# Altium PCB PCB_VS1005BOB-Pico-LCD_2024-06-08.pcbdoc
Units mil, origin at the board's own origin, x right, y up, seen from the top; angles counter-clockwise.
Board outline 9794.76 x 7584.54 mil, 2 copper layers (Top Layer, Bottom Layer); 49 components, 160 nets, 726 pads, 78 vias.
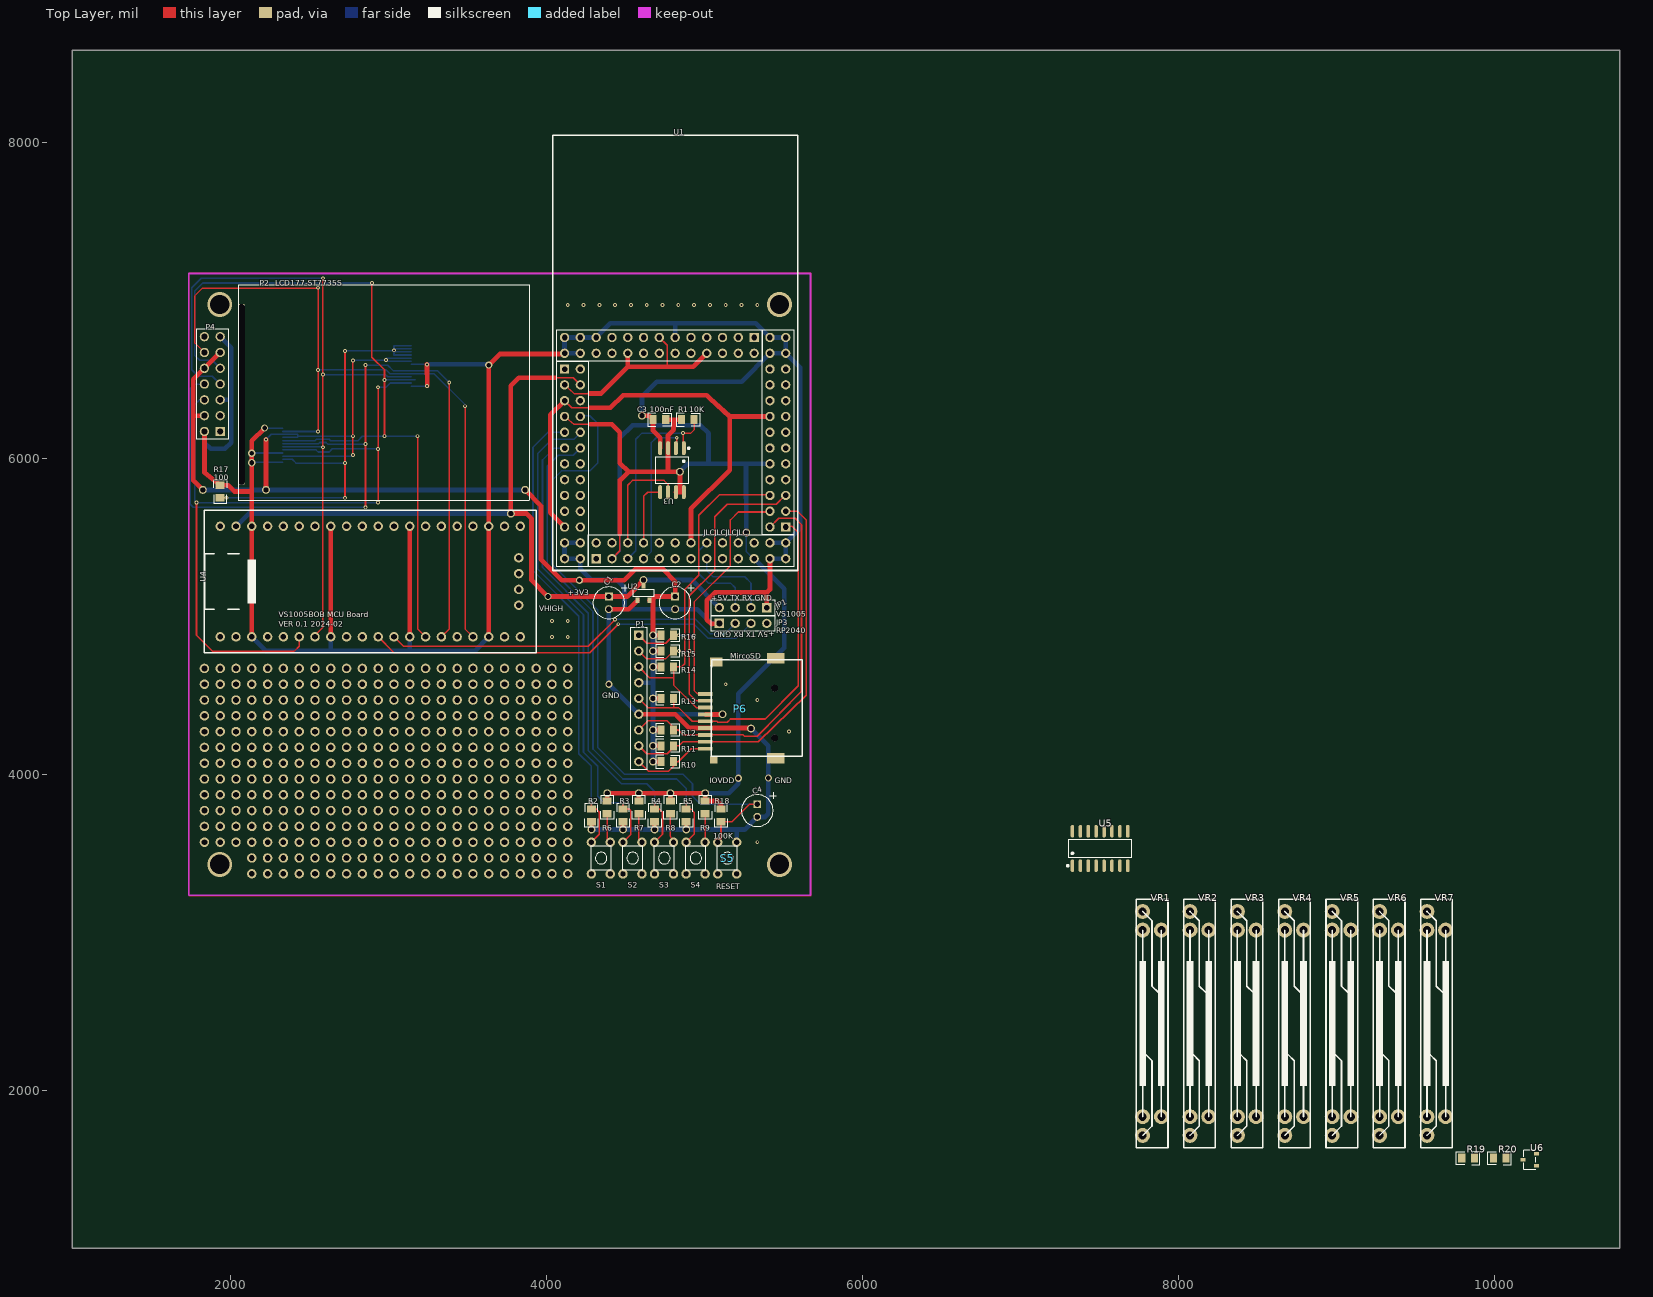
[diagram p0: Top Layer view]
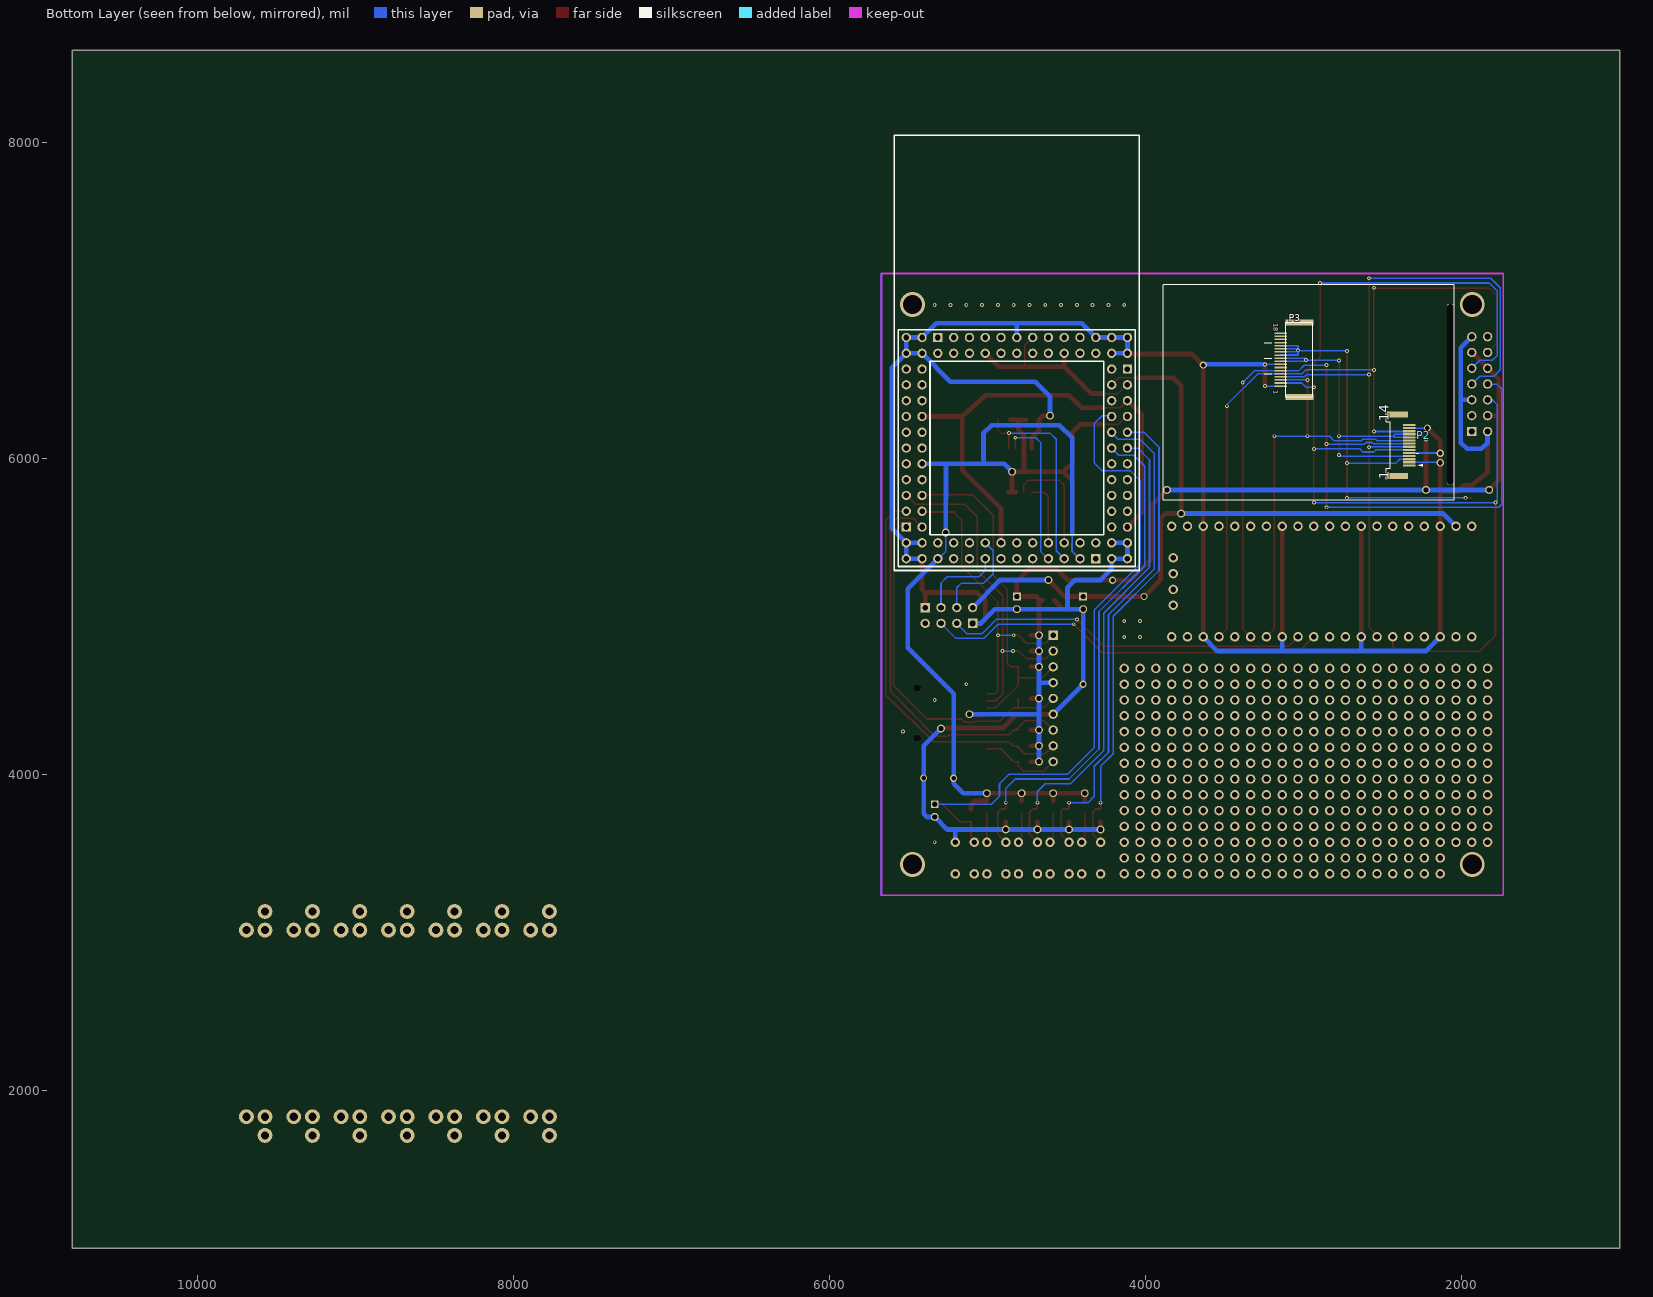
[diagram p1: Bottom Layer view, seen from below]

## Layer stack, top to bottom
Top Layer: signal copper (thickness not stored)
Dielectric: dielectric 12.6, FR-4, Dk 4.8
Bottom Layer: signal copper (thickness not stored)

## Board outline
10794.76,1000 1000,1000 1000,8584.54 10794.76,8584.54

## Components (designator, comment, footprint, x,y, rotation, side; value= is the part's Value field where it differs from the comment)
C1 "10uF" CAP-DIP 4395.86,5087.04 r270 top
C2 "10uF" CAP-DIP 4815.86,5087.04 r270 top
C3 "100nF" CAP-0805 4715.86,6247.04 r180 top
C4 "1uF" CAP-DIP 5335.86,3772.04 r270 top
JP1 "UART_VS10XX" HDR1X4#1 5395.86,5057.04 r180 top
JP3 "UART_PICO" HDR1X4#2 5095.86,4957.04 r0 top
P1 "Header 9" HDR1X9 4585.86,4882.04 r270 top
P2 "LCD177-ST7735S" LCD177-ST7735S 2435.86,6722.04 r270 top
P3 "LCD28-ST7789-HDR2X7" FPC18 3185.86,6372.04 r0 bottom
P4 "Header 7X2" HDR2X7 1935.86,6172.04 r90 top
P6 "MircoSD" MICROSD 5445.86,4232.04 r0 top
R1 "10K" RES-0805 4895.86,6247.04 r180 top
R2 "10K" RES-0805 4285.86,3742.04 r90 top
R3 "10K" RES-0805 4485.86,3742.04 r90 top
R4 "10K" RES-0805 4685.86,3742.04 r90 top
R5 "10K" RES-0805 4885.86,3742.04 r90 top
R6 "10K" RES-0805 4385.86,3792.04 r90 top
R7 "10K" RES-0805 4585.86,3792.04 r90 top
R8 "10K" RES-0805 4785.86,3792.04 r90 top
R9 "10K" RES-0805 5005.86,3792.04 r90 top
R10 "10K" RES-0805 4765.86,4082.04 r180 top
R11 "10K" RES-0805 4765.86,4182.04 r180 top
R12 "10K" RES-0805 4765.86,4282.04 r180 top
R13 "10K" RES-0805 4765.86,4482.04 r180 top
R14 "10K" RES-0805 4765.86,4682.04 r180 top
R15 "10K" RES-0805 4765.86,4782.04 r180 top
R16 "10K" RES-0805 4765.86,4882.04 r180 top
R17 "100" RES-0805 1935.86,5792.04 r270 top
R18 "100K" RES-0805 5105.86,3742.04 r90 top
R19 "10K" RES-0805 9835.86,1572.04 r0 top
R20 "10K" RES-0805 10035.86,1572.04 r0 top
S1 "UP" SW-4.5 4405.86,3572.04 r180 top
S2 "DOWN" SW-4.5 4605.86,3572.04 r180 top
S3 "D2" SW-4.5 4805.86,3572.04 r180 top
S4 "D3" SW-4.5 5005.86,3572.04 r180 top
S5 "RESET" SW-4.5 5205.86,3572.04 r180 top
U1 "VS1005BOB" VS1005BOB 4815.86,6067.04 r0 top
U2 "VOX6206" VOX6206 4615.86,5182.04 r0 top
U3 "GD25Q16CSIG" SOIC-8_L5.3-W5.3-P1.27-LS8.0-BL 4795.86,5927.04 r180 top
U4 "YD_RP2040" YD-RP2040 3435.86,5222.04 r90 top
U5 "74HC4051" SOP-16_L9.9-W3.9-P1.27-LS6.0-BL 7505.86,3532.04 r0 top
U6 "SI2302 A2" SOT-23-3_L2.9-W1.8-P1.90-LS2.4-BR 10225.86,1562.04 r0 top
VR1 "SVR-40" SVR-40MM-6P 7735.86,3212.04 r0 top
VR2 "SVR-40" SVR-40MM-6P 8035.86,3212.04 r0 top
VR3 "SVR-40" SVR-40MM-6P 8335.86,3212.04 r0 top
VR4 "SVR-40" SVR-40MM-6P 8635.86,3212.04 r0 top
VR5 "SVR-40" SVR-40MM-6P 8935.86,3212.04 r0 top
VR6 "SVR-40" SVR-40MM-6P 9235.86,3212.04 r0 top
VR7 "SVR-40" SVR-40MM-6P 9535.86,3212.04 r0 top

## Footprints (in the part's own frame and the unit in brackets; to place one, negate y for a bottom-side part, rotate by r counter-clockwise, add the part's x,y. Pads: shape width x height; smd on the part's side, far side on the other; paste and mask are expansions set on the pad)
CAP-0805 [mm]
  rect 1.16x1.45 smd paste+0 mask+0.102: 1(-1.016,0) 2(1.016,0)
  silkscreen extent -1.9,-1.03 1.87,1.04
CAP-DIP [mil]
  rect 50x50 hole 30 slot 30.2 at 0 deg paste+0 mask+2: 1(-40,0)
  round 50 hole 30 slot 30.2 at 0 deg paste+0 mask+2: 2(40,0)
  silkscreen extent -115,-100 100,120
FPC18 [mm]
  rect 4.5x1.016 smd paste+0 mask+0.051: 0(-4.064,-12.446) 0(-4.064,-0.459)
  rect 2x0.25 smd paste+0 mask+0.051: 1(-1.004,-2.209) 2(-1.004,-2.709) 3(-1.004,-3.209) 4(-1.004,-3.709) 5(-1.004,-4.209) 6(-1.004,-4.709) 7(-1.004,-5.209) 8(-1.004,-5.709) 9(-1.004,-6.209) 10(-1.004,-6.709) 11(-1.004,-7.209) 12(-1.004,-7.709) 13(-1.004,-8.209) 14(-1.004,-8.709) 15(-1.004,-9.217) 16(-1.004,-9.725) 17(-1.004,-10.233) 18(-1.004,-10.741)
  silkscreen extent -6.07,-12.45 1.65,-0.46
HDR1X4#1 [mm]
  rect 1.5x1.5 hole 0.9 paste+0 mask+0.051: 1(0,0)
  round 1.5 hole 0.9 paste+0 mask+0.051: 2(2.54,0) 3(5.08,0) 4(7.62,0)
  silkscreen extent -1.27,-1.27 8.89,1.27
HDR1X4#2 [mm]
  rect 1.5x1.5 hole 0.9 slot 0.905 at 0 deg paste+0 mask+0.051: 1(0,0)
  round 1.5 hole 0.9 paste+0 mask+0.051: 2(2.54,0) 3(5.08,0) 4(7.62,0)
  silkscreen extent -1.27,-1.27 8.89,1.27
HDR1X9 [mm]
  rect 1.5x1.5 hole 0.9 paste+0 mask+0.051: 1(0,0)
  round 1.5 hole 0.9 paste+0 mask+0.051: 2(2.54,0) 3(5.08,0) 4(7.62,0) 5(10.16,0) 6(12.7,0) 7(15.24,0) 8(17.78,0) 9(20.32,0)
  silkscreen extent -1.27,-1.27 21.59,1.27
HDR2X7 [mm]
  rect 1.5x1.5 hole 0.9 slot 0.905 at 0 deg paste+0 mask+0.051: 1(0,0)
  round 1.5 hole 0.9 slot 0.905 at 0 deg paste+0 mask+0.051: 2(0,2.54) 3(2.54,0) 4(2.54,2.54) 5(5.08,0) 6(5.08,2.54) 7(7.62,0) 8(7.62,2.54) 9(10.16,0) 10(10.16,2.54) 11(12.7,0) 12(12.7,2.54) 13(15.24,0) 14(15.24,2.54)
  silkscreen extent -1.27,-1.27 16.51,3.81
LCD177-ST7735S [mm]
  rect 0.35x2 smd far side paste+0 mask+0.051: 1(19.431,-2.67) 2(18.931,-2.67) 3(18.431,-2.67) 4(17.931,-2.67) 5(17.431,-2.67) 6(16.931,-2.67) 7(16.431,-2.67) 8(15.931,-2.67) 9(15.431,-2.67) 10(14.931,-2.67) 11(14.431,-2.67) 12(13.931,-2.67) 13(13.431,-2.67) 14(12.931,-2.67)
  rect 1x3.5 smd far side paste+0 mask+0.051: 15(21.14,-0.728) 16(11.234,-0.728)
  rect 29x1 hole 1 slot 29 at 0 deg paste+0 mask+0.051: 17(8.001,-9.271)
  silkscreen extent -9.65,-9.78 25.02,36.96
MICROSD [mm]
  rect 2.35x0.6 smd paste+0 mask+0.051: 1(-11.163,7.079) 2(-11.163,5.979) 3(-11.163,4.879) 4(-11.163,3.779) 5(-11.163,2.679) 6(-11.163,1.579) 7(-11.163,0.479) 8(-11.163,-0.621) 9(-11.163,-1.721)
  round 1.092 hole 1.092 slot 1.097 at 0 deg paste+0 mask+0.051: 10(-0.013,0) 11(-0.013,8.001)
  rect 2.794x1.651 smd paste+0 mask+0.051: GND(0.167,-3.251) GND(0.167,12.809)
  rect 1.2x1.2 smd paste+0 mask+0.051: ""(-9.8,-3.5)
  rect 2.032x1.5 smd paste+0 mask+0.051: ""(-9.4,12.2)
  silkscreen extent -10.17,-2.92 4.46,12.59
RES-0805 [mm]
  rect 1.16x1.45 smd paste+0 mask+0.102: 1(-1.016,0) 2(1.016,0)
  silkscreen extent -1.9,-1.03 1.87,1.04
SOIC-8_L5.3-W5.3-P1.27-LS8.0-BL [mm]
  oval 0.63x2.25 smd paste+0 mask+0.051: 1(-1.905,-3.53) 2(-0.635,-3.53) 3(0.635,-3.53) 4(1.905,-3.53) 5(1.905,3.53) 6(0.635,3.53) 7(-0.635,3.53) 8(-1.905,3.53)
  silkscreen extent -2.82,-3.68 2.64,2.18
SOP-16_L9.9-W3.9-P1.27-LS6.0-BL [mil]
  oval 22.6x80.24 smd paste+0 mask+2: 1(-175,-109.02) 2(-125,-109.02) 3(-75,-109.02) 4(-25,-109.02) 5(25,-109.02) 6(75,-109.02) 7(125,-109.02) 8(175,-109.02) 9(175,109.02) 10(125,109.02) 11(75,109.02) 12(25,109.02) 13(-25,109.02) 14(-75,109.02) 15(-125,109.02) 16(-175,109.02)
  silkscreen extent -210,-115 198,60
SOT-23-3_L2.9-W1.8-P1.90-LS2.4-BR [mm]
  rect 0.785x0.595 smd paste+0 mask+0.051: 1(1.092,-0.95) 2(1.092,0.95) 3(-1.093,0)
  silkscreen extent -0.95,-1.5 0.95,1.5
SVR-40MM-6P [mm]
  round 2.4 hole 1.3 paste+0 mask+0.051: 1(4,-5) 2(1,-2) 3(4,-35) 4(1,-5) 5(1,-38) 6(1,-35)
  silkscreen extent 0,-40 5.08,0
SW-4.5 [mil]
  round 60 hole 30 slot 30.2 at 0 deg paste+0 mask+2: 1(0.5,0.5) 2(120.5,0.5) 3(0.5,200.5) 4(120.5,200.5)
  silkscreen extent -5,26 126,176
VOX6206 [mil]
  rect 25x35 smd paste+0 mask+2: 1(-37.4,-78.74) 2(37.4,-78.74)
  rect 25x40 smd paste+0 mask+2: 3(0,15)
  silkscreen extent -65,-55 65,-10
VS1005BOB [mm]
  rect 1.5x1.5 hole 0.9 paste+0 mask+0.051: 1-1(12.7,17.78) 2-1(-17.78,12.7) 3-1(17.78,-12.7) 4-1(-12.7,-17.78)
  round 1.5 hole 0.9 paste+0 mask+0.051: 1-2(12.7,15.24) 1-3(10.16,17.78) 1-4(10.16,15.24) 1-5(7.62,17.78) 1-6(7.62,15.24) 1-7(5.08,17.78) 1-8(5.08,15.24) 1-9(2.54,17.78) 1-10(2.54,15.24) 1-11(0,17.78) 1-12(0,15.24) 1-13(-2.54,17.78) 1-14(-2.54,15.24) 1-15(-5.08,17.78) 1-16(-5.08,15.24) 1-17(-7.62,17.78) 1-18(-7.62,15.24) 1-19(-10.16,17.78) 1-20(-10.16,15.24) 1-21(-12.7,17.78) 1-22(-12.7,15.24) 1-23(-15.24,17.78) 1-24(-15.24,15.24) 1-25(-17.78,17.78) 1-26(-17.78,15.24) 2-2(-15.24,12.7) 2-3(-17.78,10.16) 2-4(-15.24,10.16) 2-5(-17.78,7.62) 2-6(-15.24,7.62) 2-7(-17.78,5.08) 2-8(-15.24,5.08) 2-9(-17.78,2.54) 2-10(-15.24,2.54) 2-11(-17.78,0) 2-12(-15.24,0) 2-13(-17.78,-2.54) 2-14(-15.24,-2.54) 2-15(-17.78,-5.08) 2-16(-15.24,-5.08) 2-17(-17.78,-7.62) 2-18(-15.24,-7.62) 2-19(-17.78,-10.16) 2-20(-15.24,-10.16) 2-21(-17.78,-12.7) 2-22(-15.24,-12.7) 2-23(-17.78,-15.24) 2-24(-15.24,-15.24) 2-25(-17.78,-17.78) 2-26(-15.24,-17.78) 3-2(15.24,-12.7) 3-3(17.78,-10.16) 3-4(15.24,-10.16) 3-5(17.78,-7.62) 3-6(15.24,-7.62) 3-7(17.78,-5.08) 3-8(15.24,-5.08) 3-9(17.78,-2.54) 3-10(15.24,-2.54) 3-11(17.78,0) 3-12(15.24,0) 3-13(17.78,2.54) 3-14(15.24,2.54) 3-15(17.78,5.08) 3-16(15.24,5.08) 3-17(17.78,7.62) 3-18(15.24,7.62) 3-19(17.78,10.16) 3-20(15.24,10.16) 3-21(17.78,12.7) 3-22(15.24,12.7) 3-23(17.78,15.24) 3-24(15.24,15.24) 3-25(17.78,17.78) 3-26(15.24,17.78) 4-2(-12.7,-15.24) 4-3(-10.16,-17.78) 4-4(-10.16,-15.24) 4-5(-7.62,-17.78) 4-6(-7.62,-15.24) 4-7(-5.08,-17.78) 4-8(-5.08,-15.24) 4-9(-2.54,-17.78) 4-10(-2.54,-15.24) 4-11(0,-17.78) 4-12(0,-15.24) 4-13(2.54,-17.78) 4-14(2.54,-15.24) 4-15(5.08,-17.78) 4-16(5.08,-15.24) 4-17(7.62,-17.78) 4-18(7.62,-15.24) 4-19(10.16,-17.78) 4-20(10.16,-15.24) 4-21(12.7,-17.78) 4-22(12.7,-15.24) 4-23(15.24,-17.78) 4-24(15.24,-15.24) 4-25(17.78,-17.78) 4-26(17.78,-15.24)
  silkscreen extent -19.69,-19.68 19.68,50.31
YD-RP2040 [mil]
  round 60 hole 36 paste+0 mask+2: 1(-350,1500) 2(-350,1400) 3(-350,1300) 4(-350,1200) 5(-350,1100) 6(-350,1000) 7(-350,900) 8(-350,800) 9(-350,700) 10(-350,600) 11(-350,500) 12(-350,400) 13(-350,300) 14(-350,200) 15(-350,100) 16(-350,0) 17(-350,-100) 18(-350,-200) 19(-350,-300) 20(-350,-400) 21(350,-400) 22(350,-300) 23(350,-200) 24(350,-100) 25(350,0) 26(350,100) 27(350,200) 28(350,300) 29(350,400) 30(350,500) 31(350,600) 32(350,700) 33(350,800) 34(350,900) 35(350,1000) 36(350,1100) 37(350,1200) 38(350,1300) 39(350,1400) 40(350,1500) 41(-150,-390) 42(-50,-390) 43(50,-390) 44(150,-390)
  silkscreen extent -450,-500 450,1600

## Free pads (board coordinates)
  round 60 hole 36 paste+0 mask+2: 1(1835.86,3572.04) 1(1835.86,3672.04) 1(1835.86,3772.04) 1(1835.86,3872.04) 1(1835.86,3972.04) 1(1835.86,4072.04) 1(1835.86,4172.04) 1(1835.86,4272.04) 1(1835.86,4372.04) 1(1835.86,4472.04) 1(1835.86,4572.04) 1(1835.86,4672.04) 1(1935.86,3572.04) 1(1935.86,3672.04) 1(1935.86,3772.04) 1(1935.86,3872.04) 1(1935.86,3972.04) 1(1935.86,4072.04) 1(1935.86,4172.04) 1(1935.86,4272.04) 1(1935.86,4372.04) 1(1935.86,4472.04) 1(1935.86,4572.04) 1(1935.86,4672.04) 1(2035.86,3572.04) 1(2035.86,3672.04) 1(2035.86,3772.04) 1(2035.86,3872.04) 1(2035.86,3972.04) 1(2035.86,4072.04) 1(2035.86,4172.04) 1(2035.86,4272.04) 1(2035.86,4372.04) 1(2035.86,4472.04) 1(2035.86,4572.04) 1(2035.86,4672.04) 1(2135.86,3372.04) 1(2135.86,3472.04) 1(2135.86,3572.04) 1(2135.86,3672.04) 1(2135.86,3772.04) 1(2135.86,3872.04) 1(2135.86,3972.04) 1(2135.86,4072.04) 1(2135.86,4172.04) 1(2135.86,4272.04) 1(2135.86,4372.04) 1(2135.86,4472.04) 1(2135.86,4572.04) 1(2135.86,4672.04) 1(2235.86,3372.04) 1(2235.86,3472.04) 1(2235.86,3572.04) 1(2235.86,3672.04) 1(2235.86,3772.04) 1(2235.86,3872.04) 1(2235.86,3972.04) 1(2235.86,4072.04) 1(2235.86,4172.04) 1(2235.86,4272.04) 1(2235.86,4372.04) 1(2235.86,4472.04) 1(2235.86,4572.04) 1(2235.86,4672.04) 1(2335.86,3372.04) 1(2335.86,3472.04) 1(2335.86,3572.04) 1(2335.86,3672.04) 1(2335.86,3772.04) 1(2335.86,3872.04) 1(2335.86,3972.04) 1(2335.86,4072.04) 1(2335.86,4172.04) 1(2335.86,4272.04) 1(2335.86,4372.04) 1(2335.86,4472.04) 1(2335.86,4572.04) 1(2335.86,4672.04) 1(2435.86,3372.04) 1(2435.86,3472.04) 1(2435.86,3572.04) 1(2435.86,3672.04) 1(2435.86,3772.04) 1(2435.86,3872.04) 1(2435.86,3972.04) 1(2435.86,4072.04) 1(2435.86,4172.04) 1(2435.86,4272.04) 1(2435.86,4372.04) 1(2435.86,4472.04) 1(2435.86,4572.04) 1(2435.86,4672.04) 1(2535.86,3372.04) 1(2535.86,3472.04) 1(2535.86,3572.04) 1(2535.86,3672.04) 1(2535.86,3772.04) 1(2535.86,3872.04) 1(2535.86,3972.04) 1(2535.86,4072.04) 1(2535.86,4172.04) 1(2535.86,4272.04) 1(2535.86,4372.04) 1(2535.86,4472.04) 1(2535.86,4572.04) 1(2535.86,4672.04) 1(2635.86,3372.04) 1(2635.86,3472.04) 1(2635.86,3572.04) 1(2635.86,3672.04) 1(2635.86,3772.04) 1(2635.86,3872.04) 1(2635.86,3972.04) 1(2635.86,4072.04) 1(2635.86,4172.04) 1(2635.86,4272.04) 1(2635.86,4372.04) 1(2635.86,4472.04) 1(2635.86,4572.04) 1(2635.86,4672.04) 1(2735.86,3372.04) 1(2735.86,3472.04) 1(2735.86,3572.04) 1(2735.86,3672.04) 1(2735.86,3772.04) 1(2735.86,3872.04) 1(2735.86,3972.04) 1(2735.86,4072.04) 1(2735.86,4172.04) 1(2735.86,4272.04) 1(2735.86,4372.04) 1(2735.86,4472.04) 1(2735.86,4572.04) 1(2735.86,4672.04) 1(2835.86,3372.04) 1(2835.86,3472.04) 1(2835.86,3572.04) 1(2835.86,3672.04) 1(2835.86,3772.04) 1(2835.86,3872.04) 1(2835.86,3972.04) 1(2835.86,4072.04) 1(2835.86,4172.04) 1(2835.86,4272.04) 1(2835.86,4372.04) 1(2835.86,4472.04) 1(2835.86,4572.04) 1(2835.86,4672.04) 1(2935.86,3372.04) 1(2935.86,3472.04) 1(2935.86,3572.04) 1(2935.86,3672.04) 1(2935.86,3772.04) 1(2935.86,3872.04) 1(2935.86,3972.04) 1(2935.86,4072.04) 1(2935.86,4172.04) 1(2935.86,4272.04) 1(2935.86,4372.04) 1(2935.86,4472.04) 1(2935.86,4572.04) 1(2935.86,4672.04) 1(3035.86,3372.04) 1(3035.86,3472.04) 1(3035.86,3572.04) 1(3035.86,3672.04) 1(3035.86,3772.04) 1(3035.86,3872.04) 1(3035.86,3972.04) 1(3035.86,4072.04) 1(3035.86,4172.04) 1(3035.86,4272.04) 1(3035.86,4372.04) 1(3035.86,4472.04) 1(3035.86,4572.04) 1(3035.86,4672.04) 1(3135.86,3372.04) 1(3135.86,3472.04) 1(3135.86,3572.04) 1(3135.86,3672.04) 1(3135.86,3772.04) 1(3135.86,3872.04) 1(3135.86,3972.04) 1(3135.86,4072.04) 1(3135.86,4172.04) 1(3135.86,4272.04) 1(3135.86,4372.04) 1(3135.86,4472.04) 1(3135.86,4572.04) 1(3135.86,4672.04) 1(3235.86,3372.04) 1(3235.86,3472.04) 1(3235.86,3572.04) 1(3235.86,3672.04) 1(3235.86,3772.04) 1(3235.86,3872.04) 1(3235.86,3972.04) 1(3235.86,4072.04) 1(3235.86,4172.04) 1(3235.86,4272.04) 1(3235.86,4372.04) 1(3235.86,4472.04) 1(3235.86,4572.04) 1(3235.86,4672.04) 1(3335.86,3372.04) 1(3335.86,3472.04) 1(3335.86,3572.04) 1(3335.86,3672.04) 1(3335.86,3772.04) 1(3335.86,3872.04) 1(3335.86,3972.04) 1(3335.86,4072.04) 1(3335.86,4172.04) 1(3335.86,4272.04) 1(3335.86,4372.04) 1(3335.86,4472.04) 1(3335.86,4572.04) 1(3335.86,4672.04) 1(3435.86,3372.04) 1(3435.86,3472.04) 1(3435.86,3572.04) 1(3435.86,3672.04) 1(3435.86,3772.04) 1(3435.86,3872.04) 1(3435.86,3972.04) 1(3435.86,4072.04) 1(3435.86,4172.04) 1(3435.86,4272.04) 1(3435.86,4372.04) 1(3435.86,4472.04) 1(3435.86,4572.04) 1(3435.86,4672.04) 1(3535.86,3372.04) 1(3535.86,3472.04) 1(3535.86,3572.04) 1(3535.86,3672.04) 1(3535.86,3772.04) 1(3535.86,3872.04) 1(3535.86,3972.04) 1(3535.86,4072.04) 1(3535.86,4172.04) 1(3535.86,4272.04) 1(3535.86,4372.04) 1(3535.86,4472.04) 1(3535.86,4572.04) 1(3535.86,4672.04) 1(3635.86,3372.04) 1(3635.86,3472.04) 1(3635.86,3572.04) 1(3635.86,3672.04) 1(3635.86,3772.04) 1(3635.86,3872.04) 1(3635.86,3972.04) 1(3635.86,4072.04) 1(3635.86,4172.04) 1(3635.86,4272.04) 1(3635.86,4372.04) 1(3635.86,4472.04) 1(3635.86,4572.04) 1(3635.86,4672.04) 1(3735.86,3372.04) 1(3735.86,3472.04) 1(3735.86,3572.04) 1(3735.86,3672.04) 1(3735.86,3772.04) 1(3735.86,3872.04) 1(3735.86,3972.04) 1(3735.86,4072.04) 1(3735.86,4172.04) 1(3735.86,4272.04) 1(3735.86,4372.04) 1(3735.86,4472.04) 1(3735.86,4572.04) 1(3735.86,4672.04) 1(3835.86,3372.04) 1(3835.86,3472.04) 1(3835.86,3572.04) 1(3835.86,3672.04) 1(3835.86,3772.04) 1(3835.86,3872.04) 1(3835.86,3972.04) 1(3835.86,4072.04) 1(3835.86,4172.04) 1(3835.86,4272.04) 1(3835.86,4372.04) 1(3835.86,4472.04) 1(3835.86,4572.04) 1(3835.86,4672.04) 1(3935.86,3372.04) 1(3935.86,3472.04) 1(3935.86,3572.04) 1(3935.86,3672.04) 1(3935.86,3772.04) 1(3935.86,3872.04) 1(3935.86,3972.04) 1(3935.86,4072.04) 1(3935.86,4172.04) 1(3935.86,4272.04) 1(3935.86,4372.04) 1(3935.86,4472.04) 1(3935.86,4572.04) 1(3935.86,4672.04) 1(4035.86,3372.04) 1(4035.86,3472.04) 1(4035.86,3572.04) 1(4035.86,3672.04) 1(4035.86,3772.04) 1(4035.86,3872.04) 1(4035.86,3972.04) 1(4035.86,4072.04) 1(4035.86,4172.04) 1(4035.86,4272.04) 1(4035.86,4372.04) 1(4035.86,4472.04) 1(4035.86,4572.04) 1(4035.86,4672.04) 1(4135.86,3372.04) 1(4135.86,3472.04) 1(4135.86,3572.04) 1(4135.86,3672.04) 1(4135.86,3772.04) 1(4135.86,3872.04) 1(4135.86,3972.04) 1(4135.86,4072.04) 1(4135.86,4172.04) 1(4135.86,4272.04) 1(4135.86,4372.04) 1(4135.86,4472.04) 1(4135.86,4572.04) 1(4135.86,4672.04)
  round 50 hole 30 slot 30.2 at 0 deg paste+0 mask+2: 2(1825.86,5802.04) 2(2225.86,5802.04) 2(3775.86,5652.04) 2(3865.86,5802.04) 2(4285.86,3652.04) 2(4385.86,3882.04) 2(4485.86,3652.04) 2(4585.86,3882.04) 2(4605.86,6272.04) 2(4615.86,5232.04) 2(4675.86,4082.04) 2(4675.86,4182.04) 2(4675.86,4282.04) 2(4675.86,4482.04) 2(4675.86,4682.04) 2(4675.86,4782.04) 2(4675.86,4882.04) 2(4685.86,3652.04) 2(4785.86,3882.04) 2(4845.86,5917.04) 2(4885.86,3652.04) 2(5005.86,3882.04) 2(5115.86,4382.04) 2(5265.86,5532.04) 2(5295.86,4292.04)

## Via types
v1: diameter 24.41, hole 12.2, Top Layer to Bottom Layer, tented both sides, 64 vias
v2: diameter 45, hole 30, Top Layer to Bottom Layer, tented both sides, 10 vias
v3: diameter 157.48, hole 122.05, Top Layer to Bottom Layer, tented both sides, 4 vias

## Nets (pads, with @x,y where several pads share a name; then routed paths per layer and width w, separated by ;. In a path a pad name is that pad's centre, name@x,y a point inside that pad or via, vN(x,y) a via of type N, cw(c..) or ccw(c..) an arc to the next point about the centre after c; other vN are vias at no path point)
+3V3: C2.1 P1.4 P2.4 P2.10 P2.11 P3.9 P3.10 P4.4 P4.10 P4.11 P6.4 pad.2@1825.86,5802.04 pad.2@2225.86,5802.04 pad.2@3865.86,5802.04 pad.2@4675.86,4082.04 pad.2@4675.86,4182.04 pad.2@4675.86,4282.04 pad.2@4675.86,4482.04 pad.2@4675.86,4682.04 pad.2@4675.86,4782.04 pad.2@4675.86,4882.04 pad.2@5115.86,4382.04 R10.2 R11.2 R12.2 R13.2 R14.2 R15.2 R16.2 R19.2 U2.2 U5.16 VR1.1 VR2.1 VR3.1 VR4.1 VR5.1 VR6.1 VR7.1 | length 9634.6
  Top Layer w10: v1(2775.86,6022.04) v1(2775.86,6142.04) ; v1@2775.86,6139.06 v1(2775.86,6622.04)
  Top Layer w30: pad.2@1825.86,5802.04 1765.86,5862.04 1765.86,6272.04 ; P4.4 1815.86,6272.04 1765.86,6272.04 ; P4.11 P4.10 1765.86,6502.04 1765.86,6272.04 ; pad.2@2225.86,5802.04 v1(2225.86,6122.04) ; pad.2@3865.86,5802.04 3965.86,5702.04 3965.86,5363.04 4098.86,5230.04 v2(4209.12,5230.04) 4493.86,5230.04 4565.86,5302.04 4735.86,5302.04 4815.86,5222.04 C2.1 4690.86,5127.04 4675.86,5112.04 4675.86,4882.04 R16.2 ; U2.2 4675.86,5103.34 4675.86,4987.04 ; 4673.36,4972.04 4675.86,4969.54 ; pad.2@4675.86,4082.04 R10.2 ; pad.2@4675.86,4182.04 R11.2 ; pad.2@4675.86,4282.04 R12.2 ; pad.2@4675.86,4482.04 R13.2 ; pad.2@4675.86,4682.04 R14.2 ; pad.2@4675.86,4782.04 R15.2 ; P6.4 5114.64,4380.82 pad.2@5115.86,4382.04
  Bottom Layer w10: v1(2225.86,6122.04) 2255.86,6152.04 2255.86,6153.91 P2.11 ; P2.4 2425.86,6016.11 v1@2775.86,6016.11 ; P2.10 2425.86,6134.22 2425.86,6145.02 2425.86,6153.91 P2.11 ; P2.11@2355.93,6153.91 P2.11 ; 2425.86,6145.04 2428.86,6142.04 v1(2775.86,6142.04) ; v1(2775.86,6622.04) 2985.86,6622.04 v1(2985.86,6625.02) ; P3.9 2985.86,6616.5 v1(2985.86,6625.02) 2985.86,6636.19 P3.10
  Bottom Layer w30: pad.2@1825.86,5802.04 pad.2@2225.86,5802.04 ; pad.2@2220.86,5802.04 pad.2@3865.86,5802.04 ; P1.4 4675.86,4582.04 pad.2@4675.86,4482.04 ; 4675.86,4107.04 4675.86,4782.04 pad.2@4675.86,4882.04 ; 4675.86,4382.04 pad.2@5115.86,4382.04
ADC0: U5.13 VR1.2
ADC1: U5.14 VR2.2
ADC2: U5.15 VR3.2
ADC3: U5.12 VR4.2
ADC4: U5.1 VR5.2
ADC5: U5.5 VR6.2
ADC6: U5.2 VR7.2
ADC_IN: U4.31 U5.3
ADC_SEL0: U4.1 U5.11
ADC_SEL1: U4.2 U5.10
ADC_SEL2: U4.4 U5.9
AVDD: U1.1-8 U1.1-13 U1.1-18 U1.2-3 | length 1402.7
  Top Layer w10: U1.2-3 4175.86,6412.04 4275.86,6412.04 ; U1.1-13 4765.86,6717.04 4765.86,6582.04
  Top Layer w30: 4275.86,6412.04 4345.86,6412.04 4515.86,6582.04 ; U1.1-8 4930.86,6582.04 4765.86,6582.04 4515.86,6582.04 ; 4515.86,6582.04 U1.1-18 4515.86,6582.04
CMD: P1.3 P6.3 R14.1 U1.3-6 | length 2211.8
  Top Layer w10: P1.3 4655.86,4612.04 4805.86,4612.04 4805.86,4638.84 ; P6.3 4949.12,4424.13 4805.86,4567.38 4805.86,4638.85 ; U1.3-6 5410.86,5772.04 5095.86,5772.04 4965.86,5642.04 4965.86,5262.04 4875.86,5172.04 4875.86,4702.04 4855.86,4682.04 R14.1 4805.86,4638.85
CS: P2.12 P3.5 P4.12 U4.24 | length 3356.6
  Top Layer w10: P4.12 1775.86,6732.04 1775.86,7032.04 1823.76,7079.94 v1@2557.96,7079.94 ; v1(2555.86,6172.04) v1(2555.86,6562.04) v1(2555.86,7082.04)
  Bottom Layer w10: P2.12 2332.3,6172.04 v1(2555.86,6172.04) ; v1(2555.86,6562.04) 2985.86,6562.04 3010.17,6538.04 3146.36,6538.04 3289.86,6538.04 3485.86,6342.04 v1(3485.86,6332.04) ; P3.5@3143.27,6537.76 P3.5
CVDD: U1.2-5 U1.2-21 U1.3-16 U1.4-14 | length 3181
  Top Layer w10: U1.2-5 4160.86,6322.04 4275.86,6322.04
  Top Layer w30: U1.2-21 4025.86,5657.04 4025.86,6277.04 U1.2-5 ; 4275.86,6322.04 4405.86,6322.04 4485.86,6402.04 5015.86,6402.04 5035.86,6382.04 5160.86,6267.04 ; U1.4-14 4915.86,5682.04 5160.86,5927.04 5160.86,6267.04 ; U1.3-16 5160.86,6267.04
D0: R2.2 S1.2 U1.2-9 | length 2952.3
  Top Layer w10: S1.2 4335.86,3622.04 4335.86,3762.04 4315.86,3782.04 R2.2 v1(4285.86,3822.04)
  Bottom Layer w10: U1.2-9 4010.86,6167.04 3915.86,6072.04 3915.86,5292.04 4205.86,5002.04 4205.86,4132.04 4285.86,4052.04 v1(4285.86,3822.04)
D1: R3.2 S2.2 U1.2-10 | length 3187.9
  Top Layer w10: S2.2 4535.86,3622.04 4535.86,3772.04 4525.86,3782.04 R3.2 ; v1(4485.86,3822.04) R3.2 ; 4525.41,3782.04 R3.2
  Bottom Layer w10: U1.2-10 4215.86,6162.04 4175.86,6122.04 4035.86,6122.04 3945.86,6032.04 3945.86,5302.04 4235.86,5012.04 4235.86,4142.04 4325.86,4052.04 4325.86,3862.04 4365.86,3822.04 v1(4485.86,3822.04)
D2: R4.2 S3.2 U1.2-11 | length 3038.6
  Top Layer w10: S3.2 4735.86,3622.04 4735.86,3762.04 4715.86,3782.04 R4.2 v1(4685.86,3822.04)
  Bottom Layer w10: U1.2-11 4050.86,6067.04 3975.86,5992.04 3975.86,5312.04 4265.86,5022.04 4265.86,4152.04 4475.86,3942.04 4635.86,3942.04 4685.86,3892.04 v1(4685.86,3822.04)
D3: R5.2 S4.2 U1.2-12 | length 3261
  Top Layer w10: S4.2 4935.86,3622.04 4935.86,3762.04 4915.86,3782.04 R5.2 v1(4885.86,3822.04)
  Bottom Layer w10: U1.2-12 4170.86,6022.04 4075.86,6022.04 4005.86,5952.04 4005.86,5322.04 4295.86,5032.04 4295.86,4162.04 4485.86,3972.04 4825.86,3972.04 4885.86,3912.04 v1(4885.86,3822.04)
DC: P2.7 P3.4 P4.7 U4.21 | length 3484.8
  Top Layer w10: v1(2585.86,6072.04) v1(2585.86,6532.04) v1(2585.86,7142.04)
  Bottom Layer w10: P4.7 1885.86,6522.04 1795.86,6522.04 1755.86,6562.04 1755.86,7082.04 1815.86,7142.04 v1(2585.86,7142.04) ; P2.7@2330.76,6075.14 2582.76,6075.14 v1(2585.86,6072.04) ; v1(2585.86,6532.04) 2981.86,6532.04 2995.86,6518.04 P3.4@3146.36,6518.04
GND: C1.2 C2.2 C3.2 C4.2 JP1.1 JP3.1 P1.6 P2.2 P2.5 P2.13 P3.1 P3.8 P4.2 P4.5 P4.13 P6.6 pad.2@4285.86,3652.04 pad.2@4485.86,3652.04 pad.2@4605.86,6272.04 pad.2@4685.86,3652.04 pad.2@4885.86,3652.04 pad.2@5295.86,4292.04 R2.1 R3.1 R4.1 R5.1 R17.1 R20.1 S5.1 U1.1-11 U1.1-21 U1.1-23 U1.1-24 U1.1-25 U1.1-26 U1.2-23 U1.2-24 U1.2-25 U1.2-26 U1.3-23 U1.3-24 U1.3-25 U1.3-26 U1.4-23 U1.4-24 U1.4-25 U1.4-26 U2.1 U3.4 U4.3 U4.8 U4.13 U4.18 U4.23 U4.28 U4.33 U4.38 U5.6 U5.7 U5.8 U6.2 VR1.3 VR2.3 VR3.3 VR4.3 VR5.3 VR6.3 VR7.3 | length 21714.1
  Top Layer w10: pad.2@4285.86,3652.04 R2.1 ; pad.2@4485.86,3652.04 R3.1 ; pad.2@4685.86,3652.04 R4.1 ; pad.2@4885.86,3652.04 R5.1
  Top Layer w30: P4.2 1835.86,5912.94 R17.1 1985.86,5832.04 2025.86,5792.04 2135.86,5792.04 v2(2135.86,5972.04) ; U4.3 U4.38 v2(2135.86,5972.04) ; v2@2135.86,5973.38 v2@2135.86,6032.04 ; v2(2135.86,5975.75) v2(2135.86,5972.04) ; v2(2135.86,6034.42) 2135.86,6112.04 v2(2217.06,6193.24) ; U4.8 U4.33 ; U4.13 U4.28 ; v1(3245.15,6596.84) v1@3245.86,6462.04 ; U4.18 U4.23 v2(3635.86,6592.04) 3705.86,6662.04 4110.86,6662.04 U1.1-26 ; pad.2@4285.86,3652.04 R2.1 ; C1.2 4522.16,5047.04 U2.1 ; pad.2@4485.86,3652.04 R3.1 ; P1.6 4815.86,4382.04 4903.66,4294.24 P6.6 5293.7,4294.21 pad.2@5295.86,4292.04 ; pad.2@4605.86,6272.04 4650.86,6272.04 C3.2 4675.86,6177.04 4720.86,6132.04 U3.4 ; pad.2@4685.86,3652.04 R4.1 ; pad.2@4885.86,3652.04 R5.1 ; JP3.1 5046.76,4953.74 5015.86,4980.74 5015.86,5102.04 5065.86,5152.04 5395.86,5152.04 ; JP1.1 5395.86,5152.04 ; U1.4-23 5415.86,5172.04 5395.86,5152.04
  Bottom Layer w10: v2@2135.86,5976.74 P2.2@2330.76,5976.74 ; v2@2135.86,6035.84 P2.5@2330.76,6035.84 ; v2(2217.06,6193.24) P2.13@2330.76,6193.24 ; P3.1@3146.36,6459.04 v1(3245.86,6459.04) v1@3245.86,6462.04 ; P3.8@3146.36,6596.84 v1(3245.15,6596.84)
  Bottom Layer w30: P4.2 1835.86,6102.04 1875.86,6062.04 1965.86,6062.04 2005.86,6102.04 2005.86,6442.04 ; P4.5 2005.86,6372.04 2005.86,6702.04 P4.13 ; U4.3 2225.86,4782.04 2635.86,4782.04 ; v1(3245.15,6596.84) 3631.06,6596.84 v2(3635.86,6592.04) ; U4.18 3545.86,4782.04 3135.86,4782.04 ; U1.2-24 U1.2-23 U1.2-25 U1.2-26 4215.86,5302.04 4285.86,5232.04 4445.86,5232.04 4495.86,5182.04 4495.86,5047.04 C1.2 ; U1.1-24 U1.1-26 U1.1-25 U1.1-23 U1.1-21 4405.86,6857.04 4815.86,6857.04 ; pad.2@4285.86,3652.04 4485.86,3652.04 4685.86,3652.04 4885.86,3652.04 5205.36,3652.04 ; P1.6 v2(4395.86,4572.04) C1.2 ; pad.2@4605.86,6272.04 4605.86,6392.04 4700.86,6487.04 5235.86,6487.04 U1.3-24 ; JP3.1 5045.86,4957.04 4955.86,5047.04 C2.2 C1.2 ; S5.1 5205.36,3652.04 ; pad.2@5295.86,4292.04 5405.86,4182.04 v2(5405.86,3977.79) 5405.86,3752.04 5385.76,3732.04 C4.2 5255.96,3652.04 5205.36,3652.04 ; U1.4-23 U1.4-25 U1.4-26 ; U1.4-24 U1.4-26 ; U1.3-23@5505.86,6667.04 U1.3-24 ; 2635.86,4782.04 U4.8 2635.86,4782.04 ; 2635.86,4782.04 3135.86,4782.04 ; 3135.86,4782.04 U4.13 3135.86,4782.04 ; 4815.86,6857.04 U1.1-11 4815.86,6857.04 ; 4815.86,6857.04 5325.86,6857.04 U1.3-26 ; U1.3-24 U1.3-23 ; U1.3-26 U1.3-25 ; U1.3-26 U1.3-25 ; U1.4-26 5605.86,5557.04 5605.86,6577.04 U1.3-23 ; U1.3-23 U1.3-25
  other v1: 5335.86,3572.04 5535.86,4272.04 5335.86,4472.04 5135.86,4572.04 4035.86,4872.04 4135.86,4872.04 4035.86,4972.04 4135.86,4972.04 4135.86,6972.04 4235.86,6972.04 4335.86,6972.04 4435.86,6972.04 4535.86,6972.04 4635.86,6972.04 4735.86,6972.04 4835.86,6972.04 4935.86,6972.04 5035.86,6972.04 5135.86,6972.04 5235.86,6972.04 5335.86,6972.04
IOVDD: C3.1 pad.2@4385.86,3882.04 pad.2@4585.86,3882.04 pad.2@4785.86,3882.04 pad.2@4845.86,5917.04 pad.2@5005.86,3882.04 pad.2@5265.86,5532.04 R1.2 R6.2 R7.2 R8.2 R9.2 R18.2 U1.2-7 U1.3-10 U1.4-3 U1.4-21 U3.3 U3.7 U3.8 | length 8273.4
  Top Layer w10: U1.2-7 4175.86,6217.04 4285.86,6217.04 ; U1.4-3 4465.86,5417.04 4465.86,5522.04 ; R9.2 R9.2@5005.86,3848.97
  Top Layer w30: 4278.86,6217.04 4415.86,6217.04 4465.86,6167.04 4465.86,5972.04 4520.86,5917.04 ; R6.2 4385.86,3882.04 pad.2@4585.86,3882.04 ; 4465.86,5522.04 4465.86,5864.54 4468.36,5864.54 4520.86,5917.04 ; R7.2 pad.2@4585.86,3882.04 ; 4770.86,5917.04 U3.3 ; U3.3 4770.86,6147.04 4805.86,6182.54 4805.86,6247.04 C3.1 R1.2 ; R8.2 pad.2@4785.86,3882.04 ; U3.7 U3.8 4845.86,5788.04 pad.2@4845.86,5917.04 ; R18.2 5105.86,3812.04 5085.86,3832.04 R9.2 5005.86,3882.04 pad.2@4785.86,3882.04 ; 4520.86,5917.04 pad.2@4845.86,5917.04 ; 4520.86,5917.04 pad.2@4845.86,5917.04 ; pad.2@4585.86,3882.04 pad.2@4785.86,3882.04
  Bottom Layer w10: U1.4-3 4420.86,5367.04 4466.86,5413.04 4465.86,5522.04 ; pad.2@5265.86,5532.04 5265.86,5412.04 5310.86,5367.04 U1.4-21
  Bottom Layer w30: 4465.86,5522.04 4465.86,6132.04 4545.86,6212.04 4975.86,6212.04 5027.66,6160.24 5027.66,5967.04 ; pad.2@4845.86,5917.04 4895.86,5967.04 U1.3-10 ; pad.2@5005.86,3882.04 5155.86,3882.04 5215.86,3942.04 5215.86,3977.05 5215.86,4512.04 5505.86,4802.04 5505.86,5177.04 U1.4-21 ; 5264.53,5967.04 pad.2@5265.86,5517.38
  other v2: 5215.86,3977.05
JP1_2: JP1.2 U1.4-15 | length 543.1
  Bottom Layer w10: U1.4-15 5015.86,5292.14 5055.96,5252.04 5255.86,5252.04 5295.86,5212.04 JP1.2
JP1_3: JP1.3 U1.4-16 | length 608
  Bottom Layer w10: U1.4-16 4965.86,5417.04 4965.86,5272.04 5025.86,5212.04 5165.86,5212.04 5195.86,5182.04 JP1.3
JP3_4: JP3.4
MISO0: U1.4-7 U3.2 | length 1001.2
  Top Layer w10: U3.2 4825.86,6071.02 v1(4825.86,6132.04)
  Bottom Layer w10: U1.4-7@4615.86,5362.04 4665.86,5412.04 4665.86,6102.04 4695.86,6132.04 v1(4825.86,6132.04)
MOSI0: U1.4-8 U3.5 | length 410.8
  Top Layer w10: U1.4-8 4615.86,5762.04 4641.86,5788.04 U3.5@4720.86,5788.04
MOSI1: P2.8 P3.6 P4.8 U4.15 | length 5589.2
  Top Layer w10: v1(2855.86,5692.04) v1(2855.86,6092.04) v1(2855.86,6592.04) ; U4.15 3385.86,4922.04 v1(3385.86,6482.04)
  Bottom Layer w10: P4.8 1775.86,6472.04 1745.86,6442.04 1745.86,5712.04 1765.86,5692.04 v1(2855.86,5692.04) ; P2.8@2330.76,6094.84 2558.66,6094.84 2565.86,6102.04 2605.86,6102.04 2615.86,6092.04 v1(2855.86,6092.04) ; v1(2855.86,6592.04) 2995.86,6592.04 3030.45,6557.45 P3.6 ; P3.6@3146.36,6557.44 3310.46,6557.44 v1(3385.86,6482.04)
P2_1: P2.1
P2_14: P2.14
P3_7: P3.7
P3_15: P3.15
P3_16: P3.16
P3_17: P3.17
P3_18: P3.18
P4_1: P4.1
P4_3: P4.3
P4_14: P4.14
PICO-RX: JP3.2 U4.12 | length 2319.5
  Top Layer w10: U4.12 3095.86,4812.04 4265.86,4812.04 v1(4435.86,4982.04)
  Bottom Layer w10: v1(4435.86,4982.04) 4945.86,4982.04 5035.86,4892.04 5130.86,4892.04 JP3.2
PICO-TX: JP3.3 U4.11 | length 2552.6
  Top Layer w10: U4.11 3035.86,4772.04 4275.86,4772.04 v1(4455.86,4952.04)
  Bottom Layer w10: v1(4455.86,4952.04) 4935.86,4952.04 5025.86,4862.04 5200.86,4862.04 JP3.3
R6_1: R6.1 S1.1 | length 188.6
  Top Layer w10: R6.1 4385.86,3591.04 S1.1
R7_1: R7.1 S2.1 | length 188.6
  Top Layer w10: R7.1 4585.86,3591.04 S2.1
R8_1: R8.1 S3.1 | length 185
  Top Layer w10: R8.1 4785.86,3612.04 S3.1
R9_1: R9.1 S4.1 | length 180.7
  Top Layer w10: S4.1 5005.37,3717.7 5005.86,3718.2 R9.1
R17_2: P2.3 P3.11 P3.12 P3.13 P3.14 R17.2 | length 2941.5
  Top Layer w10: R17.2 v1(1975.86,5752.04) ; v1(2725.86,5752.04) v1(2725.86,5972.04) ; v1@2725.86,5968.27 v1(2725.86,6682.04)
  Bottom Layer w10: v1(1975.86,5752.04) v1(2725.86,5752.04) ; P2.3 2391.47,5996.43 2415.86,5972.04 v1(2725.86,5972.04) ; v1(2725.86,6682.04) 3032.09,6682.04 v1(3035.86,6685.81) ; v1@3035.86,6675.56 P3.12 ; v1@3035.86,6695.24 P3.13 ; P3.11 3035.86,6655.87 v1(3035.86,6685.81) ; P3.14 3035.86,6714.93 v1(3035.86,6685.81)
RESET: P2.6 P3.2 P4.6 U4.22 | length 3417.1
  Top Layer w10: v1(2935.86,5722.04) v1(2935.86,6062.04) v1(2935.86,6452.04)
  Bottom Layer w10: P4.6 1805.86,6372.04 1775.86,6342.04 1775.86,5732.04 v1(1785.86,5722.04) v1(2935.86,5722.04) ; P2.6@2330.76,6055.44 2542.47,6055.44 2555.86,6042.04 2625.86,6042.04 2645.86,6062.04 v1(2935.86,6062.04) ; v1(2935.86,6452.04) 2985.86,6452.04 3012.56,6478.74 P3.2@3146.36,6478.74
SCK: P1.5 P6.5 R13.1 U1.3-1 | length 2296.1
  Top Layer w10: P1.5 4645.86,4422.04 4839.66,4422.04 4924.19,4337.51 P6.5 ; 4805.86,4422.04 R13.1 ; P6.5 5080.36,4337.54 5085.86,4332.04 5145.86,4332.04 5165.86,4352.04 5385.86,4352.04 5595.86,4562.04 5595.86,5532.04 5555.86,5572.04 5520.86,5572.04 U1.3-1
SCLK0: U1.4-6 U3.6 | length 691.8
  Top Layer w10: U1.4-6 4515.86,5832.04 4545.86,5862.04 4745.86,5862.04 4770.86,5837.04 U3.6@4770.86,5788.04
SCLK1: P2.9 P3.3 P4.9 U4.14 | length 5107.3
  Top Layer w10: v1(2895.86,7112.04) 2895.86,6642.04 2975.86,6562.04 v1(2975.86,6498.39) ; v1@2975.86,6145.69 v1(2975.86,6498.39) ; v1(3185.86,6142.04) 3185.86,4922.04 U4.14
  Bottom Layer w10: P4.9 1885.86,6622.04 1805.86,6622.04 1775.86,6652.04 1775.86,7062.04 1825.86,7112.04 v1(2895.86,7112.04) v1@2895.86,7109.14 ; P2.9@2330.76,6114.54 2538.36,6114.54 2545.86,6122.04 2625.86,6122.04 2635.86,6112.04 2805.86,6112.04 2835.86,6142.04 v1(2975.86,6142.04) v1(3185.86,6142.04) ; v1(2975.86,6498.39) P3.3 P3.3@3171.51,6498.39
SD0: P1.7 P6.7 R12.1 U1.3-2 | length 2543.9
  Top Layer w10: P1.7 4645.86,4342.04 4762.76,4342.04 R12.1@4822.76,4282.04 ; R12.1@4822.79,4282.04 R12.1 4835.86,4282.04 4866.96,4250.94 P6.7 ; P6.7 5247,4250.9 5255.86,4242.04 5335.86,4242.04 5615.86,4527.04 5615.86,5582.04 5575.86,5622.04 5470.86,5622.04 U1.3-2
SD1: P1.8 P6.8 R11.1 U1.3-3 | length 2510.8
  Top Layer w10: P1.8 4635.86,4132.04 4765.86,4132.04 4815.86,4182.04 R11.1@4822.76,4182.04 ; R11.1 4822.79,4182.04 4839.71,4182.04 4865.26,4207.59 P6.8 ; P6.8@5006.36,4207.54 5341.36,4207.54 5645.86,4502.04 5645.86,5612.04 5590.86,5667.04 U1.3-3
SD2: P1.1 P6.1 R16.1 U1.3-4 | length 1935.6
  Top Layer w10: P1.1 4635.86,4832.04 4755.86,4832.04 R16.1 ; R16.1@4822.79,4882.04 R16.1 ; v1(4835.86,4882.04) R16.1 ; P6.1 4956.76,4511.02 4935.86,4532.16 v1(4935.86,4882.04) 4935.86,5092.04 5165.86,5322.04 5165.86,5612.04 5215.86,5662.04 5410.86,5662.04 U1.3-4
  Bottom Layer w10: v1(4835.86,4882.04) v1(4935.86,4882.04)
SD3: P1.2 P6.2 R15.1 U1.3-5 | length 2207
  Top Layer w10: P1.2 4635.86,4732.04 4755.06,4732.04 R15.1 ; v1(4839.66,4782.04) R15.1 ; v1(4839.66,4782.04) 4822.79,4782.04 R15.1 ; 4949.12,4467.43 P6.2 ; 4949.16,4467.44 4905.86,4510.74 v1(4905.86,4782.04) 4905.86,5132.04 5065.86,5292.04 5065.86,5632.04 5145.86,5712.04 5455.86,5712.04 5510.86,5767.04 U1.3-5
  Bottom Layer w10: v1(4839.66,4782.04) v1(4905.86,4782.04)
U1_1-1: U1.1-1
U1_1-2: U1.1-2
U1_1-3: U1.1-3
U1_1-4: U1.1-4
U1_1-5: U1.1-5
U1_1-6: U1.1-6
U1_1-7: U1.1-7
U1_1-9: U1.1-9
U1_1-10: U1.1-10
U1_1-12: U1.1-12
U1_1-14: U1.1-14
U1_1-15: U1.1-15
U1_1-16: U1.1-16
U1_1-17: U1.1-17
U1_1-19: U1.1-19
U1_1-20: U1.1-20
U1_1-22: U1.1-22
U1_2-1: U1.2-1
U1_2-2: U1.2-2
U1_2-6: U1.2-6
U1_2-13: U1.2-13
U1_2-14: U1.2-14
U1_2-15: U1.2-15
U1_2-16: U1.2-16
U1_2-17: U1.2-17
U1_2-18: U1.2-18
U1_2-19: U1.2-19
U1_2-20: U1.2-20
U1_2-22: U1.2-22
U1_3-7: U1.3-7
U1_3-8: U1.3-8
U1_3-9: U1.3-9
U1_3-11: U1.3-11
U1_3-12: U1.3-12
U1_3-13: U1.3-13
U1_3-14: U1.3-14
U1_3-15: U1.3-15
U1_3-17: U1.3-17
U1_3-18: U1.3-18
U1_3-19: U1.3-19
U1_3-20: U1.3-20
U1_3-21: U1.3-21
U1_3-22: U1.3-22
U1_4-1: U1.4-1
U1_4-2: U1.4-2
U1_4-4: U1.4-4
U1_4-9: U1.4-9
U1_4-10: U1.4-10
U1_4-11: U1.4-11
U1_4-12: U1.4-12
U1_4-13: U1.4-13
U1_4-17: U1.4-17
U1_4-18: U1.4-18
U1_4-19: U1.4-19
U1_4-20: U1.4-20
U1_4-22: U1.4-22
U4_5: U4.5
U4_6: U4.6 | length 1603.8
  Top Layer w10: 1785.86,5722.04 1785.86,4882.04 1885.86,4782.04 2405.86,4782.04 2435.86,4812.04 U4.6
U4_7: U4.7 | length 1220.7
  Top Layer w10: U4.7 2535.86,4882.04 2585.86,4932.04 2585.86,6072.04
U4_9: U4.9
U4_10: U4.10
U4_16: U4.16
U4_17: U4.17 | length 1480.7
  Top Layer w10: 3485.86,6332.04 3485.86,4922.04 U4.17
U4_19: U4.19
U4_20: U4.20
U4_25: U4.25
U4_26: U4.26
U4_27: U4.27
U4_29: R20.2 U4.29 U6.1
U4_30: U4.30
U4_32: U4.32
U4_34: U4.34
U4_35: U4.35
U4_36: U4.36
U4_37: U4.37
U4_40: U4.40
U4_41: U4.41
U4_42: U4.42
U4_43: U4.43
U4_44: U4.44
U5_4: U5.4
VHIGH: C1.1 JP1.4 pad.2@3775.86,5652.04 pad.2@4615.86,5232.04 U1.2-4 U2.3 U4.39 | length 4944.6
  Top Layer w10: 4055.86,6512.04 4170.86,6512.04 U1.2-4
  Top Layer w30: 4055.86,6512.04 3825.86,6512.04 3775.86,6462.04 3775.86,5652.04 3875.86,5652.04 3905.86,5622.04 3905.86,5232.04 v2(4010.86,5127.04) C1.1 4511.56,5127.04 pad.2@4615.86,5232.04
  Bottom Layer w30: U4.39 2115.86,5652.04 pad.2@3775.86,5652.04 ; pad.2@4615.86,5232.04 4920.86,5232.04 JP1.4
VR1_4: VR1.4
VR1_5: VR1.5
VR1_6: VR1.6
VR2_4: VR2.4
VR2_5: VR2.5
VR2_6: VR2.6
VR3_4: VR3.4
VR3_5: VR3.5
VR3_6: VR3.6
VR4_4: VR4.4
VR4_5: VR4.5
VR4_6: VR4.6
VR5_4: VR5.4
VR5_5: VR5.5
VR5_6: VR5.6
VR6_4: VR6.4
VR6_5: VR6.5
VR6_6: VR6.6
VR7_4: VR7.4
VR7_5: VR7.5
VR7_6: VR7.6
XCD: P1.9 P6.9 R10.1 | length 521.9
  Top Layer w10: P1.9 4645.86,4022.04 4775.86,4022.04 4805.86,4052.04 R10.1 4835.86,4082.04 4918.07,4164.24 4949.16,4164.24 ; 4949.12,4164.28 P6.9
XCS0: R1.1 U1.4-5 U3.1 | length 1336.6
  Top Layer w10: U3.1 4865.86,6066.02 v1(4865.86,6162.04) 4915.86,6162.04 4935.86,6182.04 R1.1
  Bottom Layer w10: U1.4-5 4565.86,5417.04 4565.86,6122.04 4605.86,6162.04 v1(4865.86,6162.04)
XRST: C4.1 R18.1 R19.1 S5.2 U1.2-8 U6.3 | length 4151.9
  Top Layer w10: S5.2 5105.86,3592.04 R18.1 5175.86,3702.04 5285.86,3812.04 C4.1
  Bottom Layer w10: U1.2-8 4215.86,6272.04 4275.86,6272.04 4325.86,6222.04 4325.86,5972.04 4275.86,5922.04 4095.86,5922.04 4035.86,5862.04 4035.86,5332.04 4325.86,5042.04 4325.86,4172.04 4495.86,4002.04 4865.86,4002.04 4925.86,3942.04 4925.86,3862.04 4975.86,3812.04 C4.1
pads on no net: P2.15 P2.16 P2.17 P3.0 P6. P6.10 P6.11 P6.GND S1.3 S1.4 S2.3 S2.4 S3.3 S3.4 S4.3 S4.4 S5.3 S5.4
copper on no net:
  other v3: 1932.71,3431.89 5476.01,3431.89 1932.71,6975.19 5476.01,6975.19

## Polygon pours and split planes (outlines as drawn)
GND on Bottom Layer (solid): 1735.86,7172.04 1735.86,3242.04 1745.86,3232.04 5675.86,3232.04 5675.86,7172.04 1735.86,7172.04
GND on Top Layer (solid): 1735.86,7172.04 1735.86,3232.04 5675.86,3232.04 5675.86,7172.04 1735.86,7172.04

## Silkscreen, mask and mechanical layers (free items; w line width, h text height)
Top Overlay:
  text "JLCJLCJLCJLC" at 4995.86,5514.54 h35
  text "+3V3" at 4135.86,5134.54 h35
  text "+5V TX RX GND" at 5045.86,5099.54 h35
  text "VHIGH" at 3955.86,5034.54 h35
  text "VS1005" at 5455.86,4999.54 h35
  text "VS1005BOB MCU Board" at 2305.86,4994.54 h35
  text "VER 0.1 2024-02" at 2305.86,4934.54 h35
  text "+5V TX RX GND" at 5445.86,4904.54 h35 r180
  text "RP2040" at 5455.86,4894.54 h35
  text "GND" at 4355.86,4484.54 h35
  text "IOVDD" at 5035.86,3944.54 h35
  text "GND" at 5445.86,3944.54 h35

## Text inside footprints (layer, text, board x,y; h text height)
P2: Bottom Overlay "1" at 2462.25,5868.14 h59.05 r270; Bottom Overlay "14" at 2461.34,6237.04 h59.05 r270
P3: Bottom Overlay "1" at 3190.86,6432.04 h30 r90; Bottom Overlay "18" at 3190.86,6857.04 h30 r90